# EAGLE board jnode_v32 (EAGLE 6.5.0)
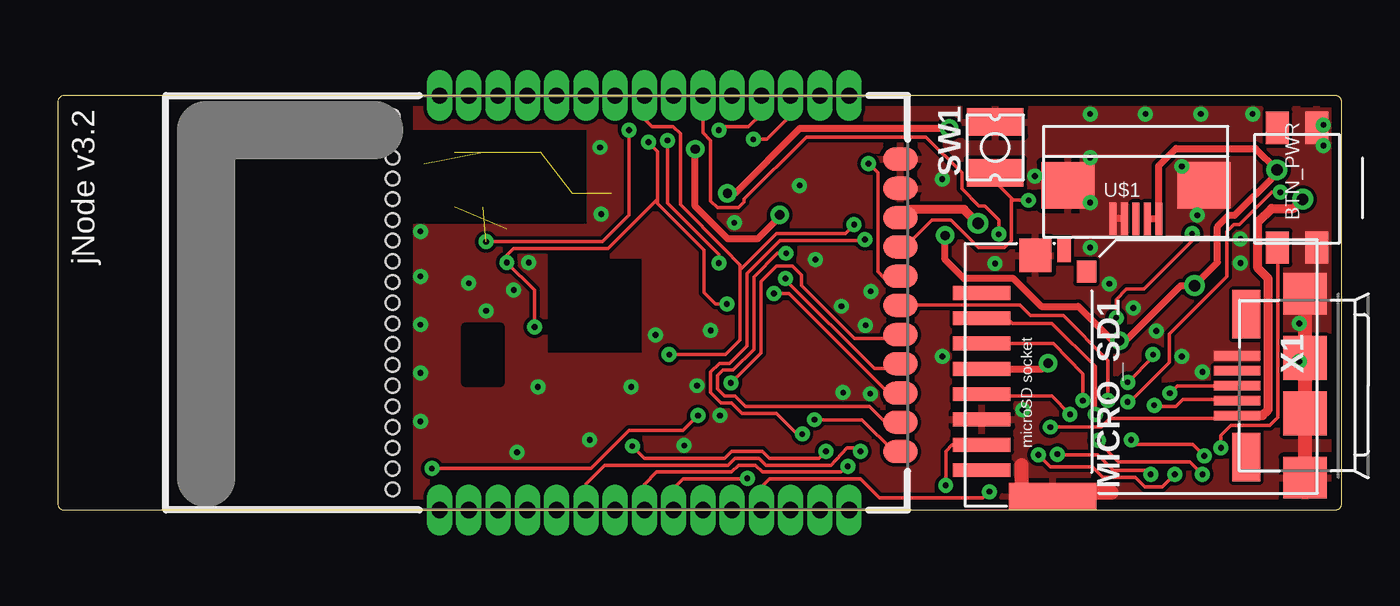
[diagram p0: board, top side]
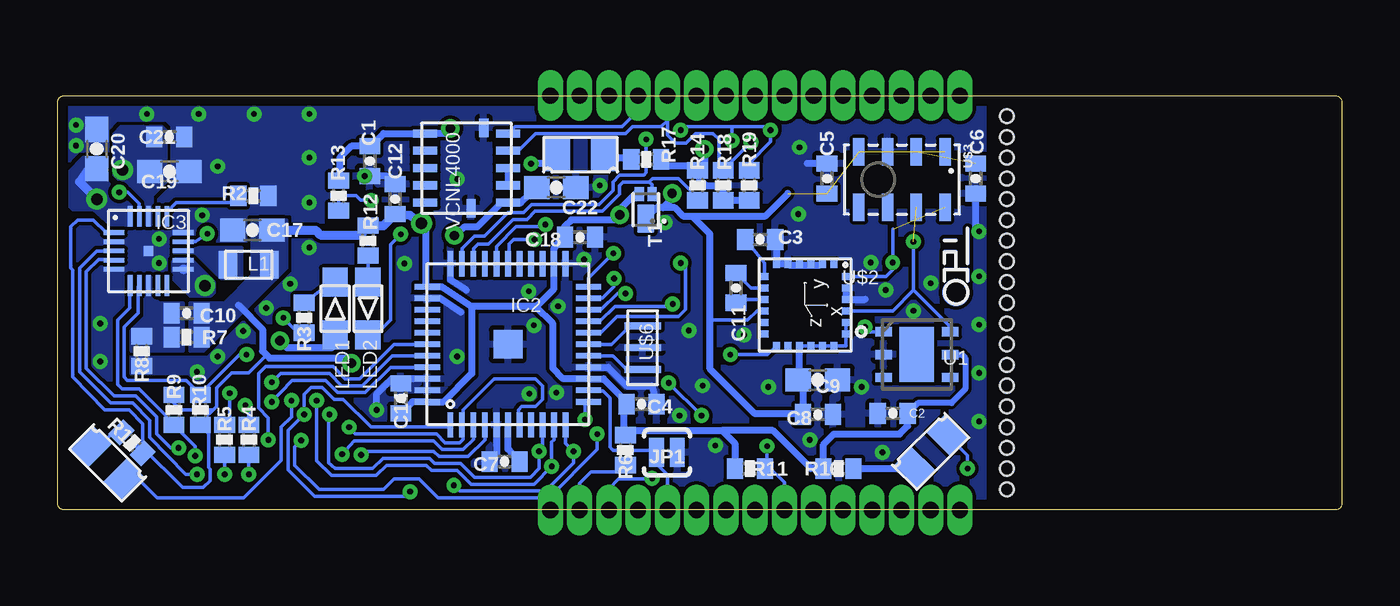
[diagram p1: board, bottom side, seen from below]

Size 55.75 x 18 mm. Coordinates in mm from the lower left corner, seen from the top.
Outline: 0.3,18 arc88 0,17.7 0,0.3 arc92 0.3,0 55.45,0 arc90 55.75,0.3 55.75,17.7 arc90 55.45,18 0.3,18
Copper layers (1*16): Top 0.018mm / dielectric 1.55mm / Bottom 0.018mm
Design rules "default": minimum track width 0.15mm, minimum drill 0.25mm, track to track 0.15mm, track to pad 0.15mm, pad to pad 0.15mm, via to via 0.15mm, smd to smd 0.15mm, copper to edge 0.45mm, drill to drill 0.3mm, minimum pad ring 0.2mm, minimum via ring 0.2mm, stop-mask expansion 0.1mm, vias tented up to drill 0.25mm, thermal gap 0.2mm
Holes 0.6 mm at 14.55,17.1 14.55,16.2 14.55,15.3 14.55,14.4 14.55,13.5 14.55,12.6 14.55,11.7 14.55,10.8 14.55,9.9 14.55,9 14.55,8.1 14.55,7.2 14.55,6.3 14.55,5.4 14.55,4.5 14.55,3.6 14.55,2.7 14.55,1.8 14.55,0.9
tRestrict: area 15.4,12.4 to 22.9,16.5; area 21.3,6.8 to 25.4,10.9; area 17.7,5.5 to 19.2,8
bRestrict: area 21.3,6.8 to 25.4,10.9; area 16.7,13.1 to 21.5,15.6

## Footprints (pad centres in the part's own frame; a part is rotated, then mirrored left to right if it is on the bottom)
EVQ-PUK02K = smd 1.4 x 1: 1 5,2.5; 2 5,0.8; 3 -0.2,2.5; 4 -0.2,0.8
0402-CAP = smd 0.7 x 0.9: 1 -0.65,0; 2 0.65,0
0603-CAP = smd 1.1 x 1: 1 -0.85,0; 2 0.85,0
JN5148_SMDTH = drill 0.7 pad 1.016 long: 1 -8.9,9.32; 2 -8.9,8.05; 3 -8.9,6.78; 4 -8.9,5.51; 5 -8.9,4.24; 6 -8.9,2.97; 7 -8.9,1.7; 8 -8.9,0.43; 9 -8.9,-0.84; 10 -8.9,-2.11; 11 -8.9,-3.38; 12 -8.9,-4.65; 13 -8.9,-5.92; 14 -8.9,-7.19; 15 -8.9,-8.46; 27 9.1,-8.46; 28 9.1,-7.19; 29 9.1,-5.92; 30 9.1,-4.65; 31 9.1,-3.38; 32 9.1,-2.11; 33 9.1,-0.84; 34 9.1,0.43; 35 9.1,1.7; 36 9.1,2.97; 37 9.1,4.24; 38 9.1,5.51; 39 9.1,6.78; 40 9.1,8.05; 41 9.1,9.32 | smd 1 x 1.5: 16 -6.36,-10.69; 17 -5.09,-10.69; 18 -3.82,-10.69; 19 -2.55,-10.69; 20 -1.28,-10.69; 21 -0.01,-10.69; 22 1.26,-10.69; 23 2.53,-10.69; 24 3.8,-10.69; 25 5.07,-10.69; 26 6.34,-10.69
QFN44 = smd 1.1 x 0.25: 1 -3.5,2.5; 2 -3.5,2; 3 -3.5,1.5; 4 -3.5,1; 5 -3.5,0.5; 6 -3.5,0; 7 -3.5,-0.5; 8 -3.5,-1; 9 -3.5,-1.5; 10 -3.5,-2; 11 -3.5,-2.5; 23 3.5,-2.5; 24 3.5,-2; 25 3.5,-1.5; 26 3.5,-1; 27 3.5,-0.5; 28 3.5,0; 29 3.5,0.5; 30 3.5,1; 31 3.5,1.5; 32 3.5,2; 33 3.5,2.5 | smd 0.25 x 1.1: 12 -2.5,-3.5; 13 -2,-3.5; 14 -1.5,-3.5; 15 -1,-3.5; 16 -0.5,-3.5; 17 0,-3.5; 18 0.5,-3.5; 19 1,-3.5; 20 1.5,-3.5; 21 2,-3.5; 22 2.5,-3.5; 34 2.5,3.5; 35 2,3.5; 36 1.5,3.5; 37 1,3.5; 38 0.5,3.5; 39 0,3.5; 40 -0.5,3.5; 41 -1,3.5; 42 -1.5,3.5; 43 -2,3.5; 44 -2.5,3.5 | smd 1.25 x 1.25: 45 0,0
QFN20 = smd 0.9 x 0.2: 1 -1.5,0.8; 2 -1.5,0.4; 3 -1.5,0; 4 -1.5,-0.4; 5 -1.5,-0.8; 11 1.5,-0.8; 12 1.5,-0.4; 13 1.5,0; 14 1.5,0.4; 15 1.5,0.8 | smd 0.2 x 0.9: 6 -0.8,-1.5; 7 -0.4,-1.5; 8 0,-1.5; 9 0.4,-1.5; 10 0.8,-1.5; 16 0.8,1.5; 17 0.4,1.5; 18 0,1.5; 19 -0.4,1.5; 20 -0.8,1.5 | smd 0.42 x 0.42: 21 0,0
SJ_2S-NO = smd 0.635 x 1.27: 1 -0.45,0; 2 0.45,0
MLP2012 = smd 0.8 x 1.2: P$1 0.9,0; P$2 -0.9,0
CHIP-LED0402 = smd 1.25 x 1.1: P$1 -0.15,0; P$2 2.15,0
GL100MD1MP1 = smd 1.1 x 1.4: 1 -1,0; 2 1,0
SENSOR_BOARD_MOLEX_47309-2651 = smd 0.6 x 2.5: 1 3.43,2.385; 2 2.33,2.385; 3 1.23,2.385; 4 0.13,2.385; 5 -0.97,2.385; 6 -2.07,2.385; 7 -3.17,2.385; 8 -4.27,2.385 | smd 1.2 x 3.79: CASE1 -5.42,-0.695 | smd 1.45 x 1.4: CASE2 5.055,0.06 | smd 1 x 0.6: SW1 5.28,-1.19 | smd 0.95 x 0.85: SW2 4.355,-2.165
0402-RES = smd 0.7 x 0.9: 1 -0.65,0; 2 0.65,0
SONDER_H_VIBSCHALTER = smd 1.2 x 2.45: 1 -1.1,0; 2 1.1,0
DFN1411-3 = smd 1.25 x 0.75: D -0.4,0 | smd 0.6 x 0.4: G 0.675,-0.275; S 0.675,0.275
DFN300X300X110-7N = smd 0.711 x 0.406: 1 -1.448,0.991; 2 -1.448,0; 3 -1.448,-0.991; 4 1.448,-0.991; 5 1.448,0; 6 1.448,0.991 | smd 1.499 x 2.388: 7 0,0
SFV5R = smd 0.3 x 1.4: P$1 0.5,0; P$2 1,0; P$3 1.5,0; P$4 2,0; P$5 2.5,0 | smd 2.3 x 2: P$6 -1.45,-1.45; P$7 4.45,-1.45
LGA4X4 = smd 0.35 x 0.3: P$1 -1.775,1.255; P$2 -1.775,0.755; P$3 -1.775,0.255; P$4 -1.775,-0.245; P$5 -1.775,-0.745; P$6 -1.775,-1.245; P$13 1.775,-1.25; P$14 1.775,-0.75; P$15 1.775,-0.25; P$16 1.775,0.25; P$17 1.775,0.75; P$18 1.775,1.25 | smd 0.3 x 0.35: P$7 -1.25,-1.775; P$8 -0.75,-1.775; P$9 -0.25,-1.775; P$10 0.25,-1.775; P$11 0.75,-1.775; P$12 1.25,-1.775; P$19 1.25,1.775; P$20 0.75,1.775; P$21 0.25,1.775; P$22 -0.25,1.775; P$23 -0.75,1.775; P$24 -1.25,1.775
LGA8 = smd 1.2 x 0.5: 1 -1.2,1.875; 2 -1.2,0.625; 3 -1.2,-0.625; 4 -1.2,-1.875; 5 1.2,-1.875; 6 1.2,-0.625; 7 1.2,0.625; 8 1.2,1.875
PRQC = smd 0.3 x 1.6: 1 -0.95,0; 2 0.95,0; GND 0,0
VNCL4000 = smd 0.35 x 1.05: 1 -1.5,-1.8; 2 -0.75,-1.8; 3 0,-1.8; 4 0.75,-1.8; 5 1.5,-1.8; 7 1.5,1.8; 8 0.75,1.8; 9 0,1.8; 10 -0.75,1.8; 11 -1.5,1.8 | smd 0.805 x 0.4: 6 1.75,-0.75; 12 -1.75,-0.2
USB-MICROB-XT = smd 0.4 x 2: D+ 0,3.1; D- -0.65,3.1; GND 1.3,3.1; ID 0.65,3.1; VBUS -1.3,3.1 | smd 1.8 x 1.9: GND@2 -4,0.15; GND@3 4,0.15 | smd 1.9 x 1.9: XT1 -1.2,0.15; XT2 1.2,0.15 | smd 2.1 x 1.2: XT3 3.1,2.7; XT4 -3.1,2.7

## Placement (x,y rotation side)
BTN_PWR  TACTILE_SWITCH  [EVQ-PUK02K]  55.45,11.6 90 top
C1  470nF  [0402-CAP]  42.2,15.15 270 bottom
C2  100nF  [0402-CAP]  19.5,4.2 0 bottom
C3  4.7µF  [0402-CAP]  25.25,11.75 0 bottom
C4  0.1µF  [0402-CAP]  30.4,4.6 180 bottom
C5  0.1µF  [0402-CAP]  22.35,14.4 90 bottom
C6  0.1µF  [0402-CAP]  15.9,14.4 270 bottom
C7  1µF  [0402-CAP]  36.35,2.1 180 bottom
C8  0.1µF  [0402-CAP]  22.75,4.15 0 bottom
C9  10µF  [0603-CAP]  22.75,5.65 180 bottom
C10  10pF  [0402-CAP]  50.15,8.55 0 bottom
C11  0.22µF  [0402-CAP]  26.3,9.65 90 bottom
C12  0.1µF  [0402-CAP]  41.1,13.5 270 bottom
C14  0.1µF  [0402-CAP]  40.85,4.85 270 bottom
C17  10µF  [0603-CAP]  47.3,12.15 0 bottom
C18  0.1µF  [0402-CAP]  33.08,11.85 180 bottom
C19  10µF / near  [0603-CAP]  50.9,14.7 0 bottom
C20  10µF / near  [0603-CAP]  54.05,15.68 270 bottom
C21  2.2µF / near  [0402-CAP]  50.9,16.2 0 bottom
C22  10µF  [0603-CAP]  34.1,14 0 bottom
IC1  [JN5148_SMDTH]  25.9,8.9 90 top
IC2  ATMEGA32U4-AUQFN44  [QFN44]  36.2,7.2 90 bottom
IC3  LTC3553  [QFN20]  51.8,11.25 0 bottom
JP1  [SJ_2S-NO]  29.3,2.5 180 bottom
L1  4.7µH  [MLP2012]  47.45,10.65 180 bottom
LED1  RED  [CHIP-LED0402]  43.7,7.75 90 bottom
LED2  GREEN  [CHIP-LED0402]  42.27,9.75 270 bottom
LED3  [GL100MD1MP1]  17.85,2.55 45 bottom
LED4  [GL100MD1MP1]  33.05,15.43 180 bottom
LED5  [GL100MD1MP1]  53.58,2.05 315 bottom
MICRO_SD1  [SENSOR_BOARD_MOLEX_47309-2651]  42.5,6 90 top
R2  1.8k  [0402-RES]  47.25,13.65 0 bottom
R3  680  [0402-RES]  45.05,8.35 270 bottom
R4  22  [0402-RES]  47.45,3.05 90 bottom
R5  22  [0402-RES]  48.5,3.05 90 bottom
R6  10k  [0402-RES]  31.1,2.6 270 bottom
R7  1.5M  [0402-RES]  50.15,7.5 180 bottom
R8  560K  [0402-RES]  52.1,6.9 270 bottom
R9  1M  [0402-RES]  50.7,4.35 90 bottom
R10  10k  [0402-RES]  49.55,4.35 270 bottom
R11  10k  [0402-RES]  25.7,1.8 180 bottom
R12  680  [0402-RES]  42.27,11.7 270 bottom
R13  2.2M  [0402-RES]  43.55,13.65 90 bottom
R14  1M  [0402-RES]  27.98,14.1 270 bottom
R15  510  [0402-RES]  52.52,2.92 315 bottom
R16  510  [0402-RES]  21.85,1.8 0 bottom
R17  510  [0402-RES]  30.2,15.22 180 bottom
R18  3k3  [0402-RES]  26.85,14.1 90 bottom
R19  3k3  [0402-RES]  25.73,14.1 90 bottom
SW1  SONDER_H_VIBRATIONSSCHALTER  [SONDER_H_VIBSCHALTER]  40.7,15.75 270 top
T1  DMP2104LP-7  [DFN1411-3]  30.23,13.05 90 bottom
U1  SHT21  [DFN300X300X110-7N]  18.45,6.75 0 bottom
U$1  SFV5R  [SFV5R]  48.3,12.65 180 top
U$2  LSM9D  [LGA4X4]  23.3,8.9 270 bottom
U$3  MPL3115A2  [LGA8]  19.1,14.35 270 bottom
U$6  RESONATORPRQC-S  [PRQC]  30.35,7.05 90 bottom
U$9  TECO-LOGO  [TECO-LOGO]  16.75,10.2 270 bottom
VCNL4000  VCNL4000  [VNCL4000]  38,14.85 90 bottom
X1  USBMICROB-XT  [USB-MICROB-XT]  54.3,5.4 90 top

## Library data of the parts
BTN_PWR = jnode; DIGIKEY: http://search.digikey.com/scripts/DkSearch/dksus.dll?Detail&name=P10852SCT-ND
C1 = sparkfun; DIGIKEY: http://www.digikey.com/product-detail/en/JMK105BJ474KV-F/587-1230-1-ND/931007
C2 = sparkfun; DIGIKEY: http://www.digikey.com/product-detail/en/C1005X5R0J104K050BA/445-1266-1-ND/567731
C3 = sparkfun; DIGIKEY: http://www.digikey.com/product-detail/en/CL05A475MQ5NRNC/1276-1056-1-ND/3889142
C4 C18 = sparkfun; DIGIKEY: http://search.digikey.com/scripts/DkSearch/dksus.dll?Detail&name=490-1318-1-ND; FARNELL: http://de.farnell.com/multicomp/mcca000051/mlcc-04025v-16v-100nf/dp/1758897; PLACE: no; TECO: yes
C5 C6 JP1 = sparkfun
C7 = sparkfun; DIGIKEY: http://search.digikey.com/scripts/DkSearch/dksus.dll?Detail&name=490-1320-1-ND; FARNELL: http://de.farnell.com/multicomp/mcca000500/mlcc-0402-x5r-6-3v-1uf/dp/1759375; TECO: yes
C8 C12 C14 = sparkfun; DIGIKEY: http://search.digikey.com/scripts/DkSearch/dksus.dll?Detail&name=490-1318-1-ND; FARNELL: http://de.farnell.com/multicomp/mcca000051/mlcc-04025v-16v-100nf/dp/1758897; TECO: yes
C9 = sparkfun; DIGIKEY: http://search.digikey.com/scripts/DkSearch/dksus.dll?Detail&name=445-7454-1-ND
C10 = sparkfun; DIGIKEY: http://search.digikey.com/scripts/DkSearch/dksus.dll?Detail&name=311-1014-1-ND; FARNELL: http://de.farnell.com/multicomp/mcca000091/mlcc-0402-np0-50v-10pf/dp/1758941; TECO: yes
C11 = sparkfun; DIGIKEY: http://www.digikey.com/product-detail/en/C0402C224K9PACTU/399-4886-1-ND/1090881
C17 = sparkfun; DIGIKEY: http://www.digikey.com/product-detail/en/C1608X6S0G106K080AB/445-7454-1-ND/2733526
C19 C20 = sparkfun; DIGIKEY: http://search.digikey.com/scripts/DkSearch/dksus.dll?Detail&name=445-7454-1-ND; FARNELL: http://de.farnell.com/multicomp/mcca000517/mlcc-0603-x5r-6-3v-10uf/dp/1759393; TECO: yes
C21 = sparkfun; DIGIKEY: http://search.digikey.com/scripts/DkSearch/dksus.dll?Detail&name=445-7396-1-ND; FARNELL: http://de.farnell.com/multicomp/mcca000501/mlcc-0402-x5r-6-3v-2-2uf/dp/1759376RL; TECO: yes
C22 = sparkfun; DIGIKEY: http://www.digikey.com/product-detail/en/C1608X6S0G106K080AB/445-7454-1-ND/2733526; TECO: yes
IC1 = jnode; DIGIKEY: http://search.digikey.com/de/de/products/JN5148%2F001M00T,534/616-1045-1-ND/2139684; FUTUREELECTRIC: http://de.futureelectronics.com/de/technologies/semiconductors/microcontrollers/32-bit/Seiten/6004977-JN5148-001M00T,534.aspx; PLACE: NO; TECO: yes
IC2 = jnode; DIGIKEY: http://search.digikey.com/scripts/DkSearch/dksus.dll?Detail&name=ATMEGA32U4-MU-ND
IC3 = jnode; DIGIKEY: http://search.digikey.com/scripts/DkSearch/dksus.dll?Detail&name=LTC3553EUD%23PBF-ND
L1 = jnode; DIGIKEY: http://search.digikey.com/scripts/DkSearch/dksus.dll?Detail&name=445-6366-1-ND; FARNELL: http://de.farnell.com/tdk/mlp2012s4r7mt/vielschicht-induktivitaet-4-7uh/dp/2345132?Ntt=MLP2012S4R7M
LED1 LED2 = jnode; DIGIKEY: http://search.digikey.com/scripts/DkSearch/dksus.dll?Detail&name=754-1128-1-ND; TECO: yes
LED3-LED5 = jnode; FARNELL: http://de.farnell.com/sharp/gl100md1mp1/ir-emitter-smd-940nm/dp/9707816?Ntt=970-7816; PLACE: no
MICRO_SD1 = teco_div; DIGIKEY: http://search.digikey.com/scripts/DkSearch/dksus.dll?Detail&name=WM3974CT-ND; TECO: yes
R2 = sparkfun; DIGIKEY: http://search.digikey.com/scripts/DkSearch/dksus.dll?Detail&name=311-1.8KJRCT-ND; FARNELL: http://de.farnell.com/vishay-draloric/crcw04021k80fkeahp/widerstand-0402-1-1k80/dp/1738853; TECO: yes
R3 = sparkfun; DIGIKEY: http://www.digikey.com/product-search/en?FV=fff40001%2Cfff800e9%2C40294%2C142c07b9%2C142c1639&mnonly=0&newproducts=0&ColumnSort=0&page=1&stock=1&pbfree=0&rohs=0&quantity=70&ptm=0&fid=0&pageSize=25
R4 R5 = sparkfun; DIGIKEY: http://search.digikey.com/scripts/DkSearch/dksus.dll?Detail&name=311-22JRCT-ND; FARNELL: http://de.farnell.com/multicomp/mc-0-0625w-0402-1-22r/widerstand-0402-1-22r/dp/1357998
R6 = sparkfun; DIGIKEY: http://search.digikey.com/scripts/DkSearch/dksus.dll?Detail&name=311-10KJRCT-ND; FARNELL: http://de.farnell.com/bourns/cr0603-jw-103elf/widerstand-0603-10k-5-0-1w/dp/2008360; TECO: yes
R7 = sparkfun; DIGIKEY: http://www.digikey.com/product-detail/en/RC0402JR-071M5L/311-1.5MJRCT-ND/729360
R8 = sparkfun; DIGIKEY: http://www.digikey.com/product-detail/en/RC0402FR-07560KL/311-560KLRCT-ND/729584
R9 = sparkfun; DIGIKEY: http://www.digikey.com/product-detail/en/RC0402FR-071ML/311-1.00MLRCT-ND/729462
R10 R11 = sparkfun; DIGIKEY: http://search.digikey.com/scripts/DkSearch/dksus.dll?Detail&name=311-10KJRCT-ND
R12 = sparkfun; DIGIKEY: http://www.digikey.com/product-detail/en/MCR01MRTF6800/RHM680CDCT-ND/2796437
R13 = sparkfun; DIGIKEY: http://search.digikey.com/scripts/DkSearch/dksus.dll?Detail&name=541-2.20MLCT-ND; FARNELL: http://de.farnell.com/te-connectivity-cgs/rh73u2a2m2jtd/widerstand-0805-2m2/dp/1174056
R14 = sparkfun; DIGIKEY: http://www.digikey.com/product-detail/en/RC0402FR-071ML/311-1.00MLRCT-ND/729462; PLACE: no
R15-R17 = sparkfun; PLACE: no
R18 R19 = sparkfun; DIGIKEY: http://search.digikey.com/scripts/DkSearch/dksus.dll?Detail&name=541-2.20MLCT-ND; FARNELL: http://de.farnell.com/bourns/cr0603-jw-103elf/widerstand-0603-10k-5-0-1w/dp/2008360
SW1 = jnode; PLACE: NO
T1 = jnode
U1 = zittel; FARNELL: http://de.farnell.com/sensirion/sht21/sensor-feuchte-temp-3x3mm-2/dp/1855468?Ntt=1855468; MPN: SHT21; OC_FARNELL: 1855468; OC_NEWARK: 20T1172; PACKAGE: DFN-6; SUPPLIER: SENSIRION
U$1 = jnode; DIGIKEY: http://www.digikey.com/product-detail/en/SFV5R-2STE1HLF/609-4331-1-ND/2626782
U$2 = jnode; DIGIKEY: http://www.digikey.de/product-detail/de/LSM9DS0TR/497-13902-1-ND/4311634
U$3 = jnode_v33; DIGIKEY: MPL3115A2-ND
U$6 = jnode; DIGIKEY: http://search.digikey.com/scripts/DkSearch/dksus.dll?Detail&name=478-5420-1-ND
U$9 = teco_div; PLACE: no
VCNL4000 = VCNL4000; DIGIKEY: http://www.digikey.com/product-detail/en/VCNL4010-GS08/VCNL4010-GS08TR-ND/2796065
X1 = sparkfun; DIGIKEY: http://search.digikey.com/scripts/DkSearch/dksus.dll?Detail&name=H11635CT-ND

## Nets
3G_INT2: IC1.34 IC2.29 U$2.P$13
!RES_JEN: IC1.29 IC2.32
ATMEGARESET: IC1.11 IC2.13 JP1.2
BALLSW: IC1.23 R13.1 SW1.2
BLE_RES: IC2.25
BUCK_FB: C10.1 IC3.8 R7.2 R8.1
BUCK_ON: IC2.40 IC3.7 R10.1
CLK: IC1.6 IC2.9 MICRO_SD1.5
CTS_JEN: IC1.16 IC2.12
GND: BTN_PWR.2 BTN_PWR.4 C1.2 C2.1 C3.2 C4.1 C5.2 C6.2 C7.2 C8.2 C9.1 C12.1 C14.1 C17.1 C18.1 C19.2 C20.1 C21.2 C22.2 IC1.25 IC1.26 IC2.5 IC2.15 IC2.23 IC2.33 IC2.35 IC2.42 IC2.43 IC2.45 IC3.2 IC3.5 IC3.15 IC3.21 JP1.1 MICRO_SD1.6 MICRO_SD1.CASE1 MICRO_SD1.CASE2 R2.2 R8.2 SW1.1 U1.2 U$1.P$4 U$1.P$5 U$1.P$6 U$1.P$7 U$2.P$5 U$2.P$6 U$2.P$22 U$2.P$23 U$3.3 U$6.GND VCNL4000.6 VCNL4000.12 X1.GND X1.GND@2 X1.GND@3
LEDRED: IC1.32 LED2.P$2
MISO: IC1.7 IC2.11 MICRO_SD1.7 R11.1
MOSI: IC1.8 IC2.10 MICRO_SD1.3
N$1: IC2.3 R4.1
N$2: C3.1 U$2.P$7
N$3: IC2.4 R5.1
N$4: C7.1 IC2.6
N$5: IC3.16 R2.1
N$6: VCNL4000.2 VCNL4000.3
N$7: C11.2 U$2.P$8
N$8: C11.1 U$2.P$9
N$9: BTN_PWR.3 IC3.4
N$10: C6.1 U$3.2
N$11: LED1.P$2 R3.1
N$12: IC3.14 R3.2
N$13: IC1.9 IC1.13
N$14: IC1.14 R6.2
N$16: IC2.17 U$6.2
N$17: IC2.16 U$6.1
N$29: LED2.P$1 R12.2
N$30: IC1.21 LED5.2
N$31: IC1.20 LED3.2
N$32: LED3.1 R16.2
N$33: LED5.1 R15.1
N$34: IC1.22 LED4.2
N$35: LED4.1 R17.2
PBSTAT: IC1.15 IC2.28 IC3.3
RTS_JEN: IC1.17 IC2.22
RX_JEN: IC1.19 IC2.21
SCLK: IC1.30 IC2.18 R19.2 U1.6 U$2.P$21 U$3.7 VCNL4000.5
SDAT: IC1.31 IC2.19 R18.2 U1.1 U$2.P$24 U$3.8 VCNL4000.4
SSEL: IC1.12 IC2.1 MICRO_SD1.2
STBY: IC2.39 IC3.6 R9.1
SUSP: IC2.41 IC3.19
SW: IC3.13 L1.P$1
TX_JEN: IC1.18 IC2.20
USB_D+: R5.2 X1.D+
USB_D-: R4.2 X1.D-
VBUS: C20.2 IC2.2 IC2.7 IC3.20 X1.VBUS
VCC: C2.2 C4.2 C10.2 C12.2 C14.2 C17.2 C18.2 IC1.24 IC2.14 IC2.24 IC2.34 IC2.44 IC3.1 L1.P$2 MICRO_SD1.4 R6.1 R7.1 R9.2 R10.2 R11.2 R12.1 R14.1 R15.2 R16.1 R17.1 R18.1 R19.1 T1.S U1.5
VOUT: C19.1 C21.1 C22.1 IC3.11 IC3.12 IC3.18 LED1.P$1 U$1.P$1 U$1.P$2 VCNL4000.1
VSENS: C1.1 C5.1 C8.1 C9.2 R13.2 T1.D U$2.P$10 U$2.P$15 U$2.P$16 U$2.P$17 U$2.P$18 U$2.P$19 U$2.P$20 U$3.1 U$3.4 VCNL4000.7
VSENS_OFF: IC2.31 R14.2 T1.G

## Tracks (layer width: path | path; a pad name or v marks a point on that pad's centre or on a via)
3G_INT2  (via drill 0.25)
  Top 0.15: 29.62,10.43 29.62,7.38 29,6.75 v26.55,6.75 | 29.62,10.43 31.2,12 34.2,12 v34.58,12.4 | IC1.34 25.47,16.98 25.8,16.65 26.73,16.65 27.05,16.35 27.05,13.28 28.95,11.32 29.62,10.65 29.62,10.43
  Bottom 0.15: v34.58,12.4 34.67,12.3 35.85,12.3 36.7,11.45 IC2.29 | U$2.P$13 24.93,6.75 v26.55,6.75
!RES_JEN  (via drill 0.25)
  Top 0.15: v30.2,16.1 30.8,16.1 31.65,16.95 31.82,17.12 IC1.29
  Bottom 0.15: IC2.32 38.2,11.35 37.65,11.9 37.23,11.9 36.2,12.93 35.52,12.93 35.17,13.28 32.25,13.28 31.65,13.88 31.65,14.25 31.35,14.55 30.3,14.55 30.2,14.65 v30.2,16.1
ATMEGARESET
  Bottom 0.15: IC2.13 32.6,5.17 32.08,5.17 31.77,4.88 31.77,2.75 31.7,2.65 31.65,2.6 29.85,2.6 arc90 JP1.2 29.75,2 29.28,1.53 IC1.11
BALLSW  (via drill 0.25)
  Top 0.15: 41.42,13.53 40.7,14.25 40.65,14.25 SW1.2 | 41.42,13.53 41.4,13.5 41.4,11.7 41.1,11.4 39.98,11.4 38.77,12.6 37.95,12.6 36.78,11.43 IC1.23 | v42.15,13.45 41.42,13.45 41.42,13.53
  Bottom 0.15: R13.1 43.55,13.65 42.8,13.65 42.6,13.45 v42.15,13.45
BUCK_FB
  pour Bottom (no thermals): 51.65,10.12 51.65,9.3 51.35,9 50.3,9 50.3,6.9 52.55,6.9 52.55,7.8 51.95,8.4 51.95,10.12
BUCK_ON  (via drill 0.25)
  Top 0.15: v46.45,5.55 47.55,6.65 v47.55,6.75
  Bottom 0.15: IC3.7 52.25,9.7 52.25,8.55 52.85,7.95 52.85,5.78 52.73,5.62 50.17,5.62 49.7,5.15 R10.1 49.55,5.05 48.9,5.7 47.85,6.75 v47.55,6.75 | IC2.40 41.23,6.7 42.52,5.4 43.42,5.4 43.95,5.92 46.08,5.92 46.15,5.85 v46.45,5.55
CLK  (via drill 0.25)
  Top 0.15: MICRO_SD1.5 40.4,4.95 43.15,4.95 v43.95,4.15 | v34.85,2.55 34.7,2.7 34.27,2.7 33.58,1.95 30.75,1.95 30.45,2.25 29.4,2.25 29.1,1.95 23.75,1.95 22.93,1.13 IC1.6
  Bottom 0.15: v43.95,4.15 43.95,4.05 43.98,4.03 43.98,2.05 43.7,1.8 42.08,1.8 41.62,2.25 39.6,2.25 39.38,2.02 38.25,2.02 37.65,1.43 35.23,1.43 34.85,1.8 v34.85,2.55 34.7,2.7 IC2.9
CTS_JEN  (via drill 0.25)
  Top 0.15: IC1.16 36.31,2.54 34.92,3.92 v32.85,3.92
  Bottom 0.15: v32.85,3.92 32.85,4.55 IC2.12
GND  (via drill 0.25)
  Top 0.15: MICRO_SD1.CASE1 45.58,0.58 45.75,0.75
  Top 0.305: U$1.P$4 U$1.P$5
  Top 0.6: X1.GND@2 X1.GND@3 | 45.75,0.75 41.85,0.75 41.85,1.95
  Bottom 0.15: 22.25,14.9 C5.2 22.25,15.15 | 19.73,15.65 U$3.3
  Bottom 0.3: C5.2 23.2,15.05 | IC2.42 40.85,5.7 | 40.85,5.7 C14.1 | IC2.35 39.15,9.2 38.25,8.6 | IC2.5 36.7,2.4 C7.2 | IC2.15 31.85,6.2 31.05,5.4 29.95,5.4 C4.1 | C12.1 41.45,14.5 C1.2 | v41.9,4.35 41.9,5.05 41.25,5.7 40.85,5.7 | 38,9.55 38.7,10 IC2.33 | U$2.P$5 U$2.P$6 24.55,11.7 C3.2 | U$2.P$23 U$2.P$22 20.7,9.15 | C6.2 15.9,12.25 v15.75,12.1
  other vias: 53.9,8.1 53.9,6.45 54.95,16.73 51.35,10.72 51.35,11.78 49.48,12.8 48.8,14.93 54.95,15.82 48.8,6.67 45.65,9.82 44.83,11.4 44.83,13.35 46.7,8.78 47.7,7.78 49.7,6 35.27,5.05 34.1,5.1 34.02,8.85 38.41,6.67 27.2,2.8 32.21,14.1 35.3,9.5 29.38,12.47 27.75,5.4 32.9,10.88 38.4,14.37 40.7,10.7 35.08,8.03 28.75,4.1 23.1,3.05 28.35,7.8 20.45,10.75 15.75,3.85 23.55,15.75 23.6,12.85 42.42,14.5 15.75,5.95 15.75,8.05 15.75,10.15 20.85,5.35 17.85,9.85 18.6,8.65 24.9,5.35 19.95,2.5 25.95,7.6 19.8,9.55 44.83,15.3 44.83,17.2 47.23,17.2 49.62,17.2 51.88,17.2
  pour Bottom (rank 3, no thermals): 44.45,10.65 44.45,17.4 55.55,17.4 55.55,5.7 49.4,5.7
  pour Top (rank 3, no thermals): 44.45,10.65 44.45,17.4 55.55,17.4 55.55,5.7 49.4,5.7
  pour Top (rank 4): 15.5,0 15.5,18.15 55.7,18.15 55.7,0
  pour Bottom (rank 4): 15.5,0 15.5,18.15 55.7,18.15 55.7,0
LEDRED  (via drill 0.25)
  Top 0.15: v40.85,11.97 40.85,12.6 40.25,13.2 40,13.2 39.25,13.95 39.25,14.65 37.7,16.2 37.65,16.2 32.5,16.2 29.8,13.5 29.8,13.38 29.55,13.12 28.65,13.12 28.35,13.43 28.35,16.05 28.01,16.39 IC1.32
  Bottom 0.15: LED2.P$2 41.85,7.7 41.3,8.25 41.3,11.53 v40.85,11.97
MISO  (via drill 0.25)
  Top 0.15: v24.95,2.77 25.48,2.25 28.95,2.25 29.25,2.55 30.6,2.55 30.9,2.25 33.05,2.25 v33.35,2.55 | MICRO_SD1.7 38.83,2.83 38.55,2.55 v38.55,1.07
  Bottom 0.15: 33.75,3.25 IC2.11 33.7,2.9 v33.35,2.55 33.35,2.05 34.58,0.82 38.3,0.82 v38.55,1.07 | R11.1 24.95,1.95 | 24.95,1.95 v24.95,2.77 | 24.95,1.95 24.2,1.2 IC1.7
MOSI  (via drill 0.25)
  Top 0.15: MICRO_SD1.3 43.22,7.23 44.5,5.9 v44.5,4.75 | v34.3,1.9 34,1.65 30.6,1.65 30.3,1.95 29.55,1.95 29.25,1.65 26,1.65 25.47,1.12 IC1.8
  Bottom 0.15: IC2.10 34.2,3.05 34.3,2.95 v34.3,1.9 35.08,1.12 37.8,1.12 38.4,1.73 39.52,1.73 39.75,1.95 41.48,1.95 41.92,1.5 43.85,1.5 44.5,2.12 v44.5,4.75
N$1  (via drill 0.25)
  Top 0.15: v47.45,1.55 47.27,1.73 45.83,1.73 45.15,2.4 43.42,2.4 v43.4,2.42
  Bottom 0.15: IC2.3 37.7,3.08 38.15,2.62 39.05,2.62 39.42,3 42.88,3 v43.4,2.42 | R4.1 v47.45,1.55
N$2
  Bottom 0.15: U$2.P$7 25.07,10.72 C3.1
N$3  (via drill 0.25)
  Top 0.15: v48.5,1.55 47.95,1 47.2,1 46.77,1.43 45.38,1.43 44.92,1.88 43.1,1.88 v42.58,2.4
  Bottom 0.15: IC2.4 37.2,3.05 37.92,2.33 39.2,2.33 39.42,2.55 42.45,2.55 v42.58,2.4 | v48.5,1.55 R5.1
N$4
  Bottom 0.3: IC2.6 36.2,2.65 C7.1
N$5
  Bottom 0.15: IC3.16 51,12.95 50.6,13.35 50.4,13.35 48.2,13.35 R2.1
N$6
  Bottom 0.3: VCNL4000.3 VCNL4000.2
N$7
  Bottom 0.15: U$2.P$8 25.65,9.65 C11.2
N$8
  Bottom 0.15: U$2.P$9 26.3,9.15 C11.1
N$9  (via drill 0.25)
  Top 0.15: v50.5,2.7 50.5,3.25 50.92,3.67 52.62,3.67 52.98,4.03 52.98,11.07 52.95,11.1 BTN_PWR.3
  Bottom 0.15: IC3.4 53.27,10.88 53.98,10.88 54.5,10.35 54.5,6.15 53.3,4.95 52.35,4.95 51.45,4.05 51.45,3.3 50.85,2.7 v50.5,2.7
N$10  (1 unrouted)
N$11
  Bottom 0.15: LED1.P$2 43.75,10 R3.1
N$12  (via drill 0.25)
  Top 0.15: v45.95,8.35 45.95,9.15 46.4,9.6 47.15,9.6 49.25,11.7 v49.25,12
  Bottom 0.15: IC3.14 49.75,11.65 v49.25,12 | R3.2 45.3,7.7 v45.95,8.35
N$13  (via drill 0.25)
  Top 0.15: v29.94,1.38 29.85,1.35 27.15,1.35 26.7,0.9 26.7,0.04 IC1.9
  Bottom 0.15: IC1.13 31.82,0.93 31.4,1.35 30,1.35 v29.94,1.38
N$14
  Bottom 0.15: R6.2 31.2,2 31.55,1.65 32.6,1.65 33.09,1.16 IC1.14
N$15
  Bottom 0.3: 24,10.65 22.65,10.65
N$16
  Bottom 0.15: IC2.17 31.7,7.2 30.95,7.95 30.85,7.95 U$6.2
N$17
  Bottom 0.15: IC2.16 31.65,6.7 31.1,6.15 30.4,6.15 U$6.1
N$29
  Bottom 0.15: LED2.P$1 R12.2
N$30  (via drill 0.25)
  Top 0.15: v45.6,4.75 45.6,6.5 43.65,8.45 42.23,8.45 41.77,8.9 36.83,8.9 36.62,8.65 IC1.21
  Bottom 0.15: LED5.2 52.6,1.65 52.55,1.65 51.42,0.53 47.67,0.53 46.05,2.15 46.05,3.6 45.6,4.05 v45.6,4.75
N$31  (via drill 0.25)
  Top 0.15: v16.25,1.8 23.15,1.8 24.8,3.45 26.3,3.45 27.15,3.45 v27.8,4.1 | IC1.20 36.45,7.5 36.41,7.46 34.59,7.46 32.3,9.75 32.3,10.2 31.9,10.6 31.2,10.6 30.52,9.93 30.52,9.82 30.52,7.67 30.52,6.83 v29.23,5.53
  Bottom 0.15: LED3.2 16.25,2.36 v16.25,1.8 | v29.23,5.53 v27.8,4.1
N$32
  Bottom 0.3: R16.2 18.65,1.8 LED3.1
N$33
  Bottom 0.15: LED5.1 53.93,2.77 53.25,3.45 R15.1
N$34  (via drill 0.25)
  Top 0.15: v35.2,15.05 35.6,14.65 35.6,10.35 35.88,10.07 IC1.22
  Bottom 0.15: LED4.2 34.2,15.05
  Bottom 0.3: 34.2,15.05 v35.2,15.05
N$35
  Bottom 0.3: LED4.1 32.25,15.3 30.93,15.3 R17.2
PBSTAT  (via drill 0.25)
  Top 0.15: v35.05,11.75 34.95,11.7 31.35,11.7 29.93,10.28 29.93,7.12 29.18,6.38 28.73,6.38 28.35,6 28.35,5.1 28.8,4.65 29.25,4.65 29.7,4.2 31.2,4.2 32.1,3.3 v32.33,3.3 | v45.17,3.02 45.17,2.98 46.05,2.1 49.15,2.1 v49.7,1.55
  Bottom 0.15: IC3.3 54.05,11.25 54.8,10.5 54.8,6 53.45,4.65 52.5,4.65 51.75,3.9 51.75,3.15 50.2,1.55 v49.7,1.55 49.75,1.57 | v45.17,3.02 45.45,2.75 45.45,1.95 44.4,0.9 41.6,0.9 41.15,1.35 40.05,1.35 39.23,0.53 34.42,0.53 | 34.42,0.53 32.33,2.62 v32.33,3.3 | 34.42,0.53 34.42,0.07 IC1.15 | IC2.28 36.15,10.75 36.15,11.55 35.95,11.75 v35.05,11.75
RTS_JEN  (via drill 0.25)
  Top 0.15: v31.62,11.15 31.25,11.15 30.23,10.12 30.23,6.97 29.32,6.08 28.88,6.08 28.65,5.85 28.65,5.25 28.95,4.95 29.4,4.95 29.85,4.5 35.25,4.5 35.94,3.81 IC1.17
  Bottom 0.15: IC2.22 32.7,10.07 v31.62,11.15
RX_JEN  (via drill 0.25)
  Top 0.15: IC1.19 37.11,6.15 35.45,6.15 31.6,10 v31.6,10.05
  Bottom 0.15: v31.6,10.05 31.6,9.7 32.1,9.2 IC2.21
SCLK  (via drill 0.25)  (1 unrouted)
  Top 0.15: v28.7,10.72 28.7,11.1 26.48,13.32 v26.48,16.05 | v28.7,16.5 28.85,16.65 30,16.65 30.55,17.2 IC1.30 | v24.8,16.5 24.8,12.8 23.65,11.65 v18.6,11.65
  Bottom 0.15: IC2.18 32.17,7.7 31.48,8.4 28.8,8.4 28.5,8.7 28.5,10.53 v28.7,10.72 | VCNL4000.5 35.9,16.65 31.25,16.65 30.55,17.35 IC1.30 | v28.7,16.5 28.55,16.65 26.48,16.65 | 26.48,16.65 24.9,16.65 24.8,16.55 v24.8,16.5 24.8,16 25.73,15.07 R19.2 | v26.48,16.05 26.48,16.65 | 18.6,9.55 19.5,8.65 U$2.P$21 | 18.6,9.55 v18.6,11.65 | U1.6 17,7.95 18.6,9.55
SDAT  (via drill 0.25)  (1 unrouted)
  Top 0.15: v25.65,15.97 26.05,15.57 26.05,13.5 | 26.05,13.5 26.05,13.3 28.05,11.3 28.05,9.45 28.55,8.95 v29.05,8.95 | 26.05,13.5 23.9,11.35 19.8,11.35 19.5,11.05 v19.5,10.75 20.7,9.55 v20.7,7.95
  Bottom 0.15: IC2.19 32.2,8.2 31.55,8.85 29.2,8.85 v29.05,8.95 | VCNL4000.4 35.75,15.6 35,16.35 31.1,16.35 30.8,16.65 29.55,16.65 29.28,16.92 | 29.28,16.92 29.28,16.28 28.93,15.93 28.48,15.93 28.05,16.35 27.3,16.35 27.05,16.1 27.05,14.9 26.85,14.7 R18.2 26.85,14.78 v25.65,15.97 | 29.28,16.92 IC1.31 | 19.5,12.2 v19.5,10.75 19.5,10.45 19.8,10.15 U$2.P$24 | U1.1 20.49,7.74 v20.7,7.95
SSEL  (via drill 0.25)
  Top 0.15: MICRO_SD1.2 41.2,8.35 41.45,8.11 43.17,8.11 45.05,6.22 v45.05,4.15 | v40.45,0.8 40.17,0.53 35.67,0.53 34.85,1.35 30.9,1.35 30.55,1 IC1.12
  Bottom 0.15: IC2.1 38.75,3.75 38.75,3.6 42.15,3.6 43.35,4.8 43.75,4.8 44.27,5.33 44.75,5.33 45.05,5.03 v45.05,4.15 45.75,3.45 45.75,1.75 44.6,0.6 40.65,0.6 v40.45,0.8
STBY  (via drill 0.25)
  Top 0.15: v49.77,2.35 49.27,2.85 46.8,2.85 v46.6,3.05
  Bottom 0.15: IC3.6 52.62,9.72 52.62,8.78 53.15,8.25 53.15,5.45 52.95,5.25 52.2,5.25 50.85,3.9 R9.1 | 50.6,3.6 R9.1 | v46.6,3.05 46.6,4 47.02,4.42 47.02,5.92 46.73,6.22 43.8,6.22 43.27,5.7 42.65,5.7 41.15,7.2 IC2.39 | R9.1 49.77,2.77 v49.77,2.35
SUSP  (via drill 0.25)
  Top 0.15: v46.45,4.7 46.55,4.7 48.25,6.4 48.25,7.65 50.75,10.15 50.75,12.1 51.05,12.4 51.3,12.4 52.7,13.8 v53.08,13.8
  Bottom 0.15: IC3.19 52.2,13.3 52.7,13.8 v53.08,13.8 | IC2.41 41.3,6.2 42.4,5.1 43.6,5.1 44.12,5.62 45.58,5.62 45.6,5.6 v46.45,4.7
SW
  pour Bottom (no thermals): 50.67,11.1 49.7,11.1 48.65,10.05 47.75,10.05 47.75,11.4 50.67,11.4
TX_JEN  (via drill 0.25)
  Top 0.15: IC1.18 37.04,4.95 36.2,4.95 31.75,9.4 v31.1,9.4
  Bottom 0.15: v31.1,9.4 31.45,9.4 32.15,8.7 IC2.20
USB_D+  (via drill 0.25)
  Top 0.15: v48.27,5.08 48.6,5.4 X1.D+
  Bottom 0.15: R5.2 48.65,3.45 48.27,3.83 v48.27,5.08
USB_D-  (via drill 0.25)
  Top 0.15: X1.D- 50.38,4.8 48.85,4.8 48.55,4.5 47.65,4.5 v47.6,4.55
  Bottom 0.15: R4.2 47.45,4.4 v47.6,4.55
VBUS  (via drill 0.25, 0.5)
  Top 0.15: X1.VBUS 50.45,4.1 50.33,3.98 45.67,3.98 45.3,3.6 v43.1,3.6
  Top 0.4: X1.VBUS 52.3,4.1 52.55,4.35 52.55,10.05 52.1,10.5 52.1,12.5 52.7,13.1 53.65,13.1 v54.05,13.5
  Bottom 0.15: IC2.7 35.75,3.75 35.75,4.35 35.6,4.5 35,4.5 34.7,4.8 34.7,5.4 35,5.7 36.8,5.7 38.15,4.35 38.15,3.75 IC2.2 38.15,3.65 38.15,3.08 38.3,2.92 38.92,2.92 39.3,3.3 42.83,3.3 43.08,3.55 v43.1,3.6
  Bottom 0.4: v54.05,13.5 54.8,14.25 54.38,14.82 C20.2
  pour Bottom (no thermals): 52.55,12.38 52.55,13.2 53.6,14.25 53.6,15.3 54.65,15.3 55.25,14.7 55.25,13.2 55.1,13.05 54.2,13.05 53.45,12.38
VCC  (via drill 0.4, 0.5)
  Top 0.3: MICRO_SD1.4 42.76,6.13 v43,6.38 | 36.36,12.46 IC1.24 | v27.68,15.68 27.68,13.2 29.1,11.78 30.38,11.78 31.35,12.75 v31.35,12.82
  Top 0.4: 36.39,12.45 IC1.24 36.99,13.05 39.35,13.05 v39.95,12.45
  Bottom 0.15: IC3.1 53.65,12.05 54.2,12.6 54.88,12.6 55.17,12.3 55.17,10.5 55.1,10.43 55.1,5.78 53.7,4.35 52.65,4.35 52.05,3.75 52.05,2.7 50.33,0.97 49.42,0.97 49.12,1.27 49.12,1.77 49.2,1.85 49.2,3.3 R10.2 49.55,3.95 49.4,3.95 49,4.35 | 31.18,4.42 31.15,4.45 C4.2 | R9.2 50.7,4.65 50.4,4.35 49,4.35 | 49,4.35 48.85,4.5 48.85,5.3 48.2,5.95 47.45,5.95 46.67,6.72
  Bottom 0.2: IC2.34 39.75,9.75
  Bottom 0.25: U1.5 16.5,6.75 16.35,6.6 16.35,5.25 16.95,4.65 18.4,4.65 C2.2
  Bottom 0.3: C4.2 31,4.65 32.05,5.7 IC2.14 33.8,5.7 34.25,6.15 34.25,8.1 35,8.85 | C14.2 40.35,4.7 IC2.44 39,4.7 37.77,5.92 37.77,8.85 | IC2.34 39.08,9.7 37.77,8.85 | 39.75,9.75 39.75,12.2 v39.95,12.45 | 40.95,12.9 C12.2 | 26.9,3.45 26.35,2.9 R11.2 | 35,8.85 37.77,8.85 | 26.9,3.45 30.7,3.45 R6.1 31.18,3.58 31.18,4.42 | 47.9,8.9 46.85,7.85 46.85,6.9 46.67,6.72 46.55,6.6 43.23,6.6 v43,6.38 | 35,8.85 34.85,8.95 34.2,9.6 IC2.24 34.2,11.35 33.8,11.85 C18.2 33.73,12.32 33.45,12.6 31.57,12.6 v31.35,12.82 31.35,13.05 30.68,13.72 T1.S | 52.05,2.7 52.21,2.7 R15.2 | R14.1 27.9,14.68 27.9,14.4 27.6,14.1 27.15,14.1 26.85,13.8 R18.1 R19.1 | 26.9,3.45 24.7,3.45 23.05,1.8 R16.1 22.5,2.85 22.05,3.3 19.2,3.3 18.85,3.65 C2.2 | R17.1 29.35,14.95 28.32,14.95 28,14.93 R14.1 | v27.68,15.68 27.68,15.07 R14.1
  Bottom 0.4: v39.95,12.45 40.45,12.8 C12.2 41.6,12.35 R12.1 42.6,11.95 44.35,11.95 44.55,12.15 46.4,12.15 46.45,12.1 C17.2
  pour Bottom (no thermals): 47.3,12.6 47.3,10.2 48.5,9 50,9 50,6.9 49.4,6.9 45.8,10.5 45.8,12.6
VOUT  (via drill 0.4, 0.5)
  Top 0.3: v38.52,11.93 38.52,10.88 39.35,10.05 41.5,10.05 42.7,8.85 44.3,8.85 45.8,7.35 v46.1,7.35 46.35,7.35 48.75,9.75 v49.35,9.75 50.35,10.75 50.35,12.3 50.85,12.8 51.1,12.8 52.85,14.55 v52.92,14.78 52,15.7 48.55,15.7 47.8,14.95 U$1.P$1
  Top 0.305: U$1.P$2 U$1.P$1
  Bottom 0.3: v46.1,7.35 45.8,7.05 43.85,7.05 43.6,7.3 LED1.P$1 | C22.1 35.65,13.35 VCNL4000.1 36.48,13.35 37.52,12.3 38.08,12.3 v38.52,11.93
  Bottom 0.4: IC3.11 50.25,10.45
  pour Bottom (no thermals): 51.65,12.38 51.65,13.65 51.05,14.25 51.05,16.5 51.2,16.65 53,16.65 53.3,16.35 53.3,14.55 52.25,13.5 52.25,12.75 51.88,12.38
  pour Bottom (rank 2, no thermals): 50.6,10.95 49.7,10.95 48.95,10.2 48.95,9.45 49.1,9.3 50,9.3 50.75,10.05 50.75,10.8
VSENS  (via drill 0.4)  (3 unrouted)
  Top 0.3: v38.7,16.57 32.23,16.57 29.4,13.75 v29.07,13.75
  Bottom 0.15: U$2.P$20 U$2.P$19 21.52,7.12 U$2.P$18 U$2.P$17 U$2.P$16 U$2.P$15 | U$2.P$10 25.4,8.65 25.8,8.25 27.3,8.25 27.45,8.4
  Bottom 0.3: v38.7,16.57 38.92,16.35 VCNL4000.7 41.6,16.35 42.15,15.8 C1.1 43,15.8 43.5,15.3 43.5,14.6 R13.2 | v29.07,13.75 29.1,13.72 29.1,13.5 29.48,13.12 | 29.48,13.12 29.75,13.12 T1.D | 29.48,13.12 28.95,13.12 28.57,12.75 28.2,12.75 | 24.05,13.75 25.05,12.75 28.2,12.75 | 28.2,12.75 27.45,12 27.45,8.4 27.45,6.15 25.5,4.2 23.45,4.2 C8.1 23.4,5.45 C9.2 23.55,5.7 U$2.P$15
VSENS_OFF
  Bottom 0.15: IC2.31 37.7,11.35 37.5,11.55 37.05,11.55 35.98,12.62 35.38,12.62 35.02,12.97 32.1,12.97 31.95,13.12 31.35,13.72 31.35,14.1 31.2,14.25 30.75,14.25 30.35,14.25 30.07,14.25 | R14.2 28.07,13.35 28.07,13.68 28.8,14.4 29.5,14.4 29.93,14.4 30.07,14.25 | T1.G 29.95,14.12 30.07,14.25

## Text on the board
tPlace: jNode v3.2
tNames: U$1 | BTN_PWR
bNames: VCNL4000 | IC3 | U$2 | L1 | IC2 | U$6 | LED2 | LED1